# Altium PCB PCB1.PcbDoc
Units mm, origin at the board's own origin, x right, y up, seen from the top; angles counter-clockwise.
Board outline 25 x 35 mm, 2 copper layers (Top Layer, Bottom Layer); 7 components, 7 nets, 22 pads, 0 vias.
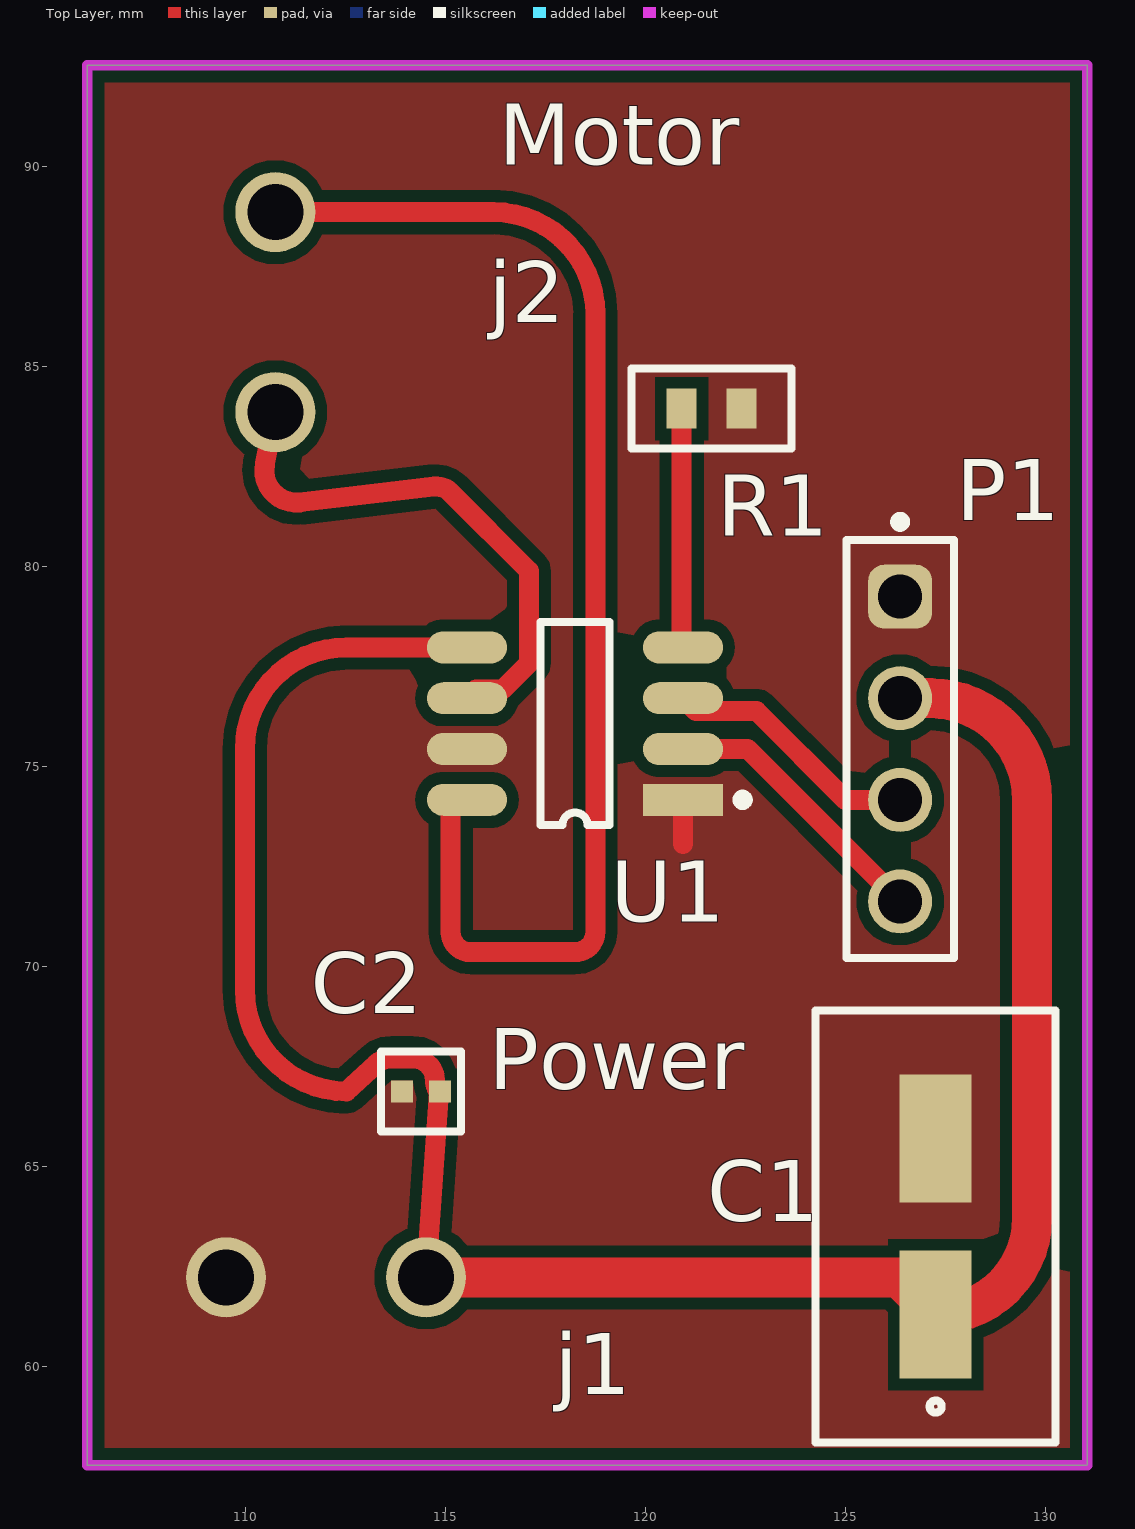
[diagram p0: Top Layer view]
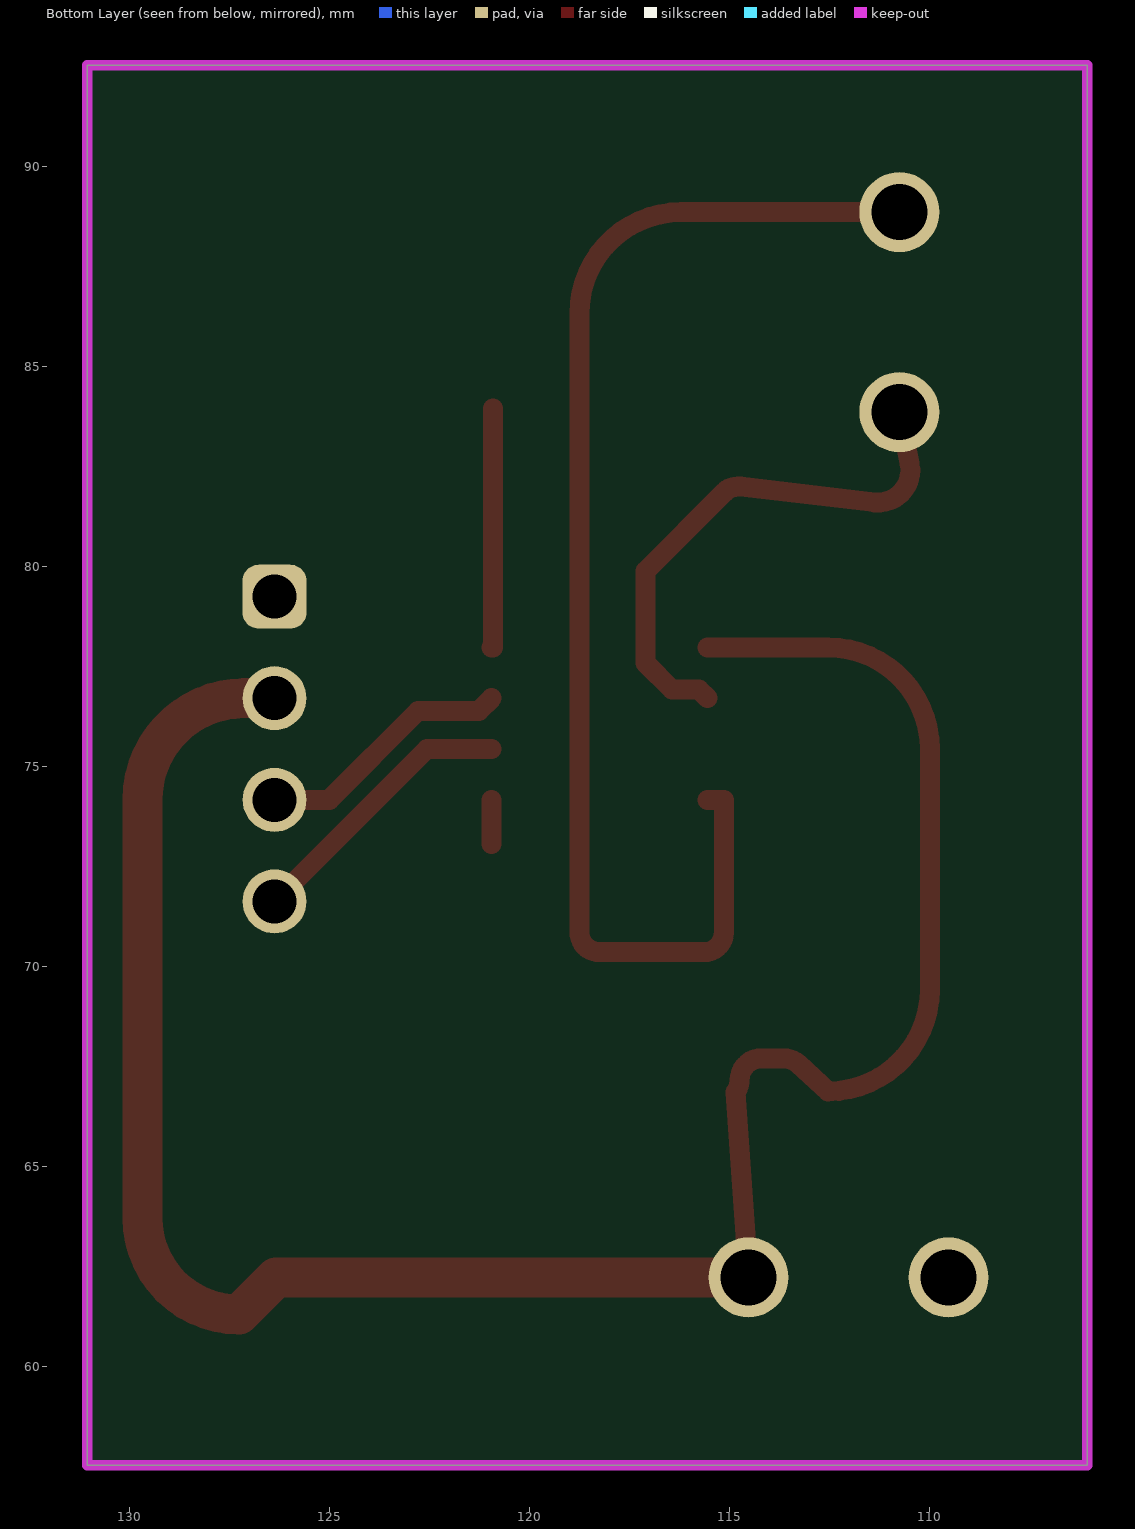
[diagram p1: Bottom Layer view, seen from below]
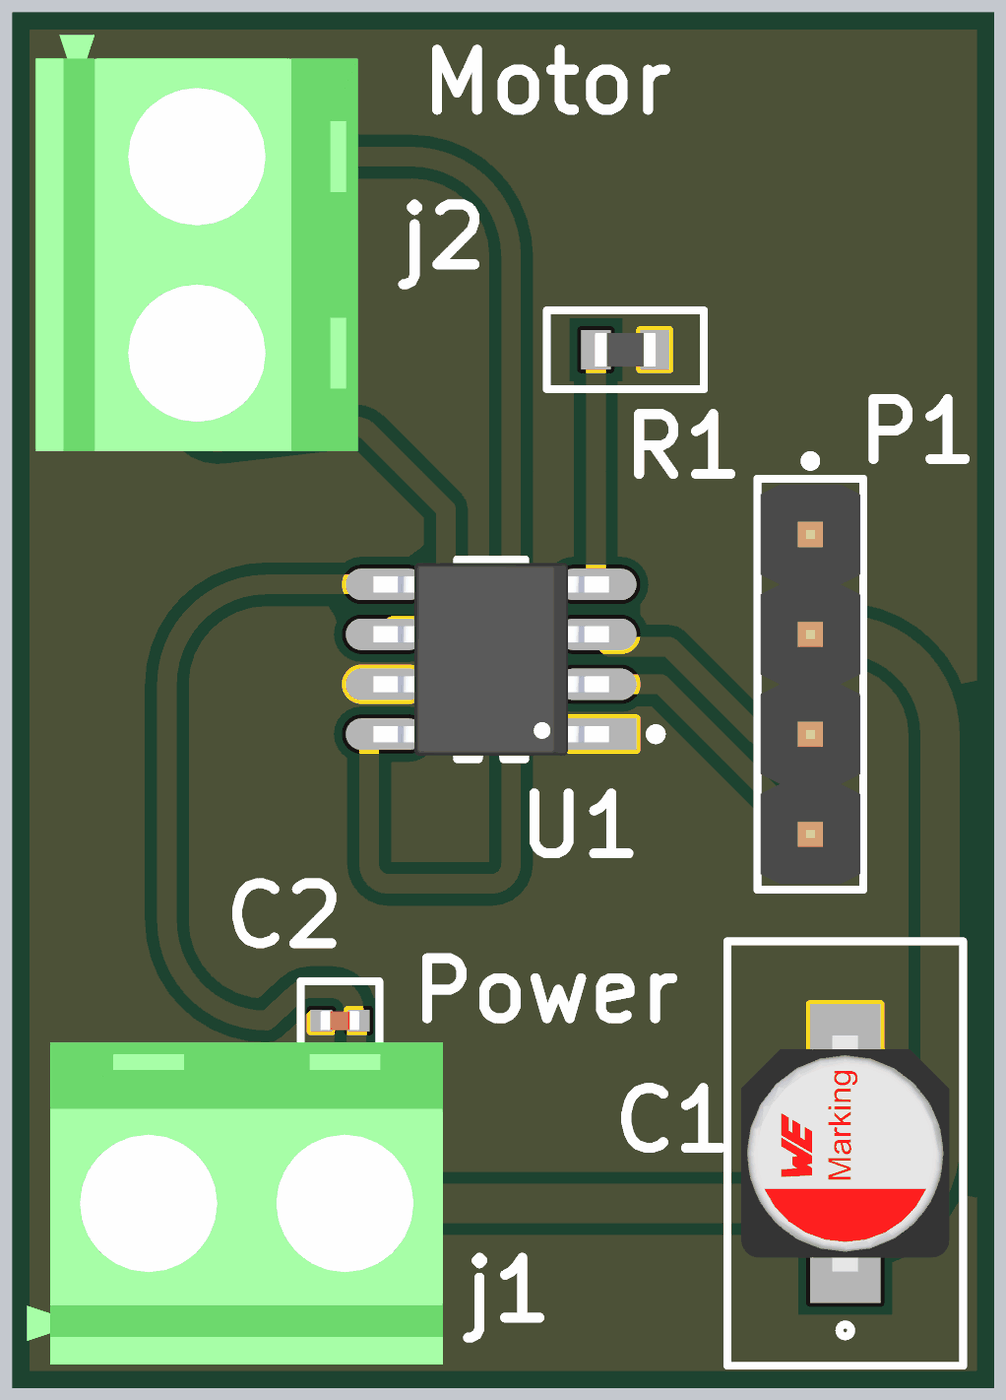
[diagram p2: 3D render of the assembled board from above, using the file's embedded part models]

## Layer stack, top to bottom
Top Solder: solder mask 0.0102, Solder Resist, Dk 3.5
Top Layer: signal copper 0.0356
Dielectric 1: dielectric 0.32, FR-4, Dk 4.8
Bottom Layer: signal copper 0.0356
Bottom Solder: solder mask 0.0102, Solder Resist, Dk 3.5

## Board outline
106.045,57.531 106.045,92.531 131.045,92.531 131.045,57.531

## Design rules (kind name [scope] priority, off if disabled: settings)
Clearance [All] p1: gap=0.3 ignorepadtopadclearanceinfootprint=FALSE
MinimumSolderMaskSliver [All] p1: minsoldermaskwidth=0.19
PolygonConnect [All] p1: connectstyle=Direct reliefconductorwidth=0.254 reliefentries=4 polygonreliefangle="90 Angle" airgapwidth=0.254
RoutingVias [All] p1: holewidth=0.711 width=1.27 viastyle="Through Hole" minholewidth=0.711 minwidth=1.27 maxholewidth=0.711 maxwidth=1.27
SilkToSolderMaskClearance [IsPad] p1: minsilkscreentomaskgap=0.15 clearancetoexposedcopper=TRUE
SolderMaskExpansion [All] p1: expansion=0.102 istentingtop=FALSE
SupplyNets "Schematic Supply Nets_1" [InNet('VCC')] p1: voltage=0.000
SupplyNets "Schematic Supply Nets" [InNet('GND')] p2: voltage=0.000
Width [All] p1: maxlimit=1 minlimit=0.4 preferedwidth=0.5
28 further rules are at their usual default settings.

## Components (designator, comment, footprint, x,y, rotation, side; value= is the part's Value field where it differs from the comment)
C1 "electrolytic capacitor" "electrolytic capacitor" 127.254,63.5 r90 top
C2 "Ceramic capacitor" "ceramic capacitor" 114.388,66.881 r0 top
j1 "Terminal Block" "Terminal block" 112.014,62.23 r270 top
j2 "Terminal Block" "Terminal block" 110.744,86.36 r180 top
P1 "61300411121" 61300411121 126.365,75.438 r270 top
R1 "RCS060330K0FKEA" RCS060330K0FKEA 121.654,83.947 r180 top
U1 "DRV8871" DRV8871 118.237,76.073 r180 top

## Footprints (in the part's own frame and the unit in brackets; to place one, negate y for a bottom-side part, rotate by r counter-clockwise, add the part's x,y. Pads: shape width x height; smd on the part's side, far side on the other; paste and mask are expansions set on the pad)
61300411121 [mm] "Pin Header, pitch 2.54 mm, THT, Vertical, single row, 4p"
  rrect50% 1.6x1.6 hole 1.1: 1(-3.81,0)
  round 1.6 hole 1.1: 2(-1.27,0) 3(1.27,0) 4(3.81,0)
  silkscreen extent -5.8,-1.35 5.23,1.35, body extent -5.08,-1.27 5.08,1.27, height 8.57
"ceramic capacitor" [mm]
  rect 0.55x0.55 smd: 1(-0.475,0) 2(0.475,0)
  silkscreen extent -1,-1 1,1, body extent -0.5,-0.25 0.5,0.25, height 0.55
DRV8871 [mm]
  rect 2x0.8 smd: 1(-2.7,1.905)
  oval 2x0.8 smd: 2(-2.7,0.635) 3(-2.7,-0.635) 4(-2.7,-1.905) 5(2.7,-1.905) 6(2.7,-0.635) 7(2.7,0.635) 8(2.7,1.905)
  silkscreen extent -4.32,-2.54 0.86,2.54, body extent -3,-2.45 3,2.45, height 1.7
"electrolytic capacitor" [mm]
  rect 3.2x1.8 smd: 1(-2.2,0) 2(2.2,0)
  silkscreen extent -5.4,-3 5.4,3, body extent -3,-2.65 3,2.65, height 5.35
RCS060330K0FKEA [mm]
  rect 0.75x1 smd: 1(-0.75,0) 2(0.75,0)
  silkscreen extent -2,-1 2,1, body extent -0.77,-0.43 0.77,0.43, height 0.55
"Terminal block" [mm]
  round 2 hole 1.4: 1(0,2.5) 2(0,-2.5)
  body extent -4.1,-5.6 4.1,5, height 10

## Part data
C1: manf part number=865080342006, part number=732-8416-2-ND, manf="Würth Elektronik", supplier=digikey
C2: manf part number=CL05B104KP5NNNC, part number=1276-1002-2-ND, manf="Samsung Electro-Mechanics", supplier=digikey
j1 j2: part number=300000007278, supplier=Makers
P1: library part CMP-1502-01064-3, Color=Black, Contact Resistance=20mΩ, Current Rating=3A, Max Operating Temperature=105°C, Min Operating Temperature=-40°C, Operating Supply Voltage=250V, Connector Type="Male Pin", Contact Material=Copper, Contact Mating Length=5.9944mm, Contact Plating=Gold, Gender=Male, Height=8.89mm, Lead Free="Lead Free", Lead Pitch=2.54mm, Mount="Through Hole", NexarPartId=32855522, Number of Contacts=4, Number of Pins=4, Number of Positions=4, Number of Rows=1, Orientation=Vertical, Packaging=Bulk, Pitch=2.54mm, REACH SVHC=Unknown, RoHS=Compliant, Termination=Solder, Voltage Rating=250V
R1: part number=541-10453-2-ND, manf="Vishay Dale", manf part number=RCS060330K0FKEA, supplier=digikey
U1: MANFACTURER PART NUMBER=DRV8871DDAR, part number=296-43024-2-ND, MANFACTURER="Texas Instruments", supplier=digikey

## Nets (pads, with @x,y where several pads share a name; then routed paths per layer and width w, separated by ;. In a path a pad name is that pad's centre, name@x,y a point inside that pad or via, vN(x,y) a via of type N, cw(c..) or ccw(c..) an arc to the next point about the centre after c; other vN are vias at no path point)
GND: C1.2 C2.1 j1.2 P1.1 R1.1 U1.1 U1.7 | length 1.1
  Top Layer w0.5: 120.937,73.058 U1.1
Netj2_1: j2.1 U1.6 | length 13.7
  Top Layer w0.5: j2.1 110.485,82.558 ccw(c111.27,82.402) 111.363,81.607 114.708,82 cw(c114.767,81.503) 115.117,81.86 115.119,81.858 117.087,79.89 117.087,77.584 116.431,76.928 115.757,76.928 U1.6
Netj2_2: j2.2 U1.8 | length 32.8
  Top Layer w0.5: j2.2 116.205,88.86 cw(c116.205,86.32) 118.745,86.32 118.745,70.866 cw(c118.237,70.866) 118.237,70.358 115.628,70.358 cw(c115.628,70.858) 115.128,70.858 115.128,74.168 U1.8
NetP1_3: P1.3 U1.3 | length 6.5
  Top Layer w0.5: U1.3 121.257,76.388 122.776,76.388 124.996,74.168 P1.3
NetP1_4: P1.4 U1.2 | length 7
  Top Layer w0.5: U1.2 122.555,75.438 P1.4
NetR1_2: R1.2 U1.4 | length 6
  Top Layer w0.5: R1.2 120.904,77.978 U1.4
VCC: C1.1 C2.2 j1.1 P1.2 U1.5 | length 56.9
  Top Layer w0.5: j1.1 114.838,66.856 ccw(c114.813,66.856) 114.813,66.881 114.774,66.978 cw(c115.238,67.164) 114.738,67.159 ccw(c114.188,67.156) 114.188,67.706 113.638,67.706 ccw(c113.638,67.156) 113.266,67.561 112.522,66.881 cw(c112.522,69.421) 109.982,69.421 109.982,75.438 cw(c112.522,75.438) 112.522,77.978 U1.5
  Top Layer w1: j1.1 126.324,62.23 C1.1 ccw(c127.254,63.713) 129.667,63.713 129.667,74.168 ccw(c127.127,74.168) 127.127,76.708 P1.2

## Polygon pours and split planes (outlines as drawn)
GND on Top Layer "GND_L01_P004" (solid, remove dead copper, pour order 4): 106.045,57.531 106.045,92.531 131.045,92.531 131.045,57.531
GND on Top Layer "GND_L01_P000" (solid, remove dead copper, pour order 0): 106.045,57.531 106.045,92.531 131.045,92.531 131.045,57.531

## Keep-outs
Keep-Out Layer:
  lines w0.254: 106.045,57.531 131.045,57.531 ; 106.045,57.531 106.045,92.531 ; 106.045,57.531 131.045,57.531 ; 106.045,57.531 106.045,92.531 ; 106.045,92.531 131.045,92.531 ; 106.045,92.531 131.045,92.531 ; 131.045,57.531 131.045,92.531 ; 131.045,57.531 131.045,92.531

## Silkscreen, mask and mechanical layers (free items; w line width, h text height)
Top Overlay:
  text "Motor" at 116.332,90.043 h1.52
  text "Power" at 116.078,66.929 h1.52